# EAGLE board RTC_pt (EAGLE 6.1)

Size 46.99 x 55.88 mm. Coordinates in mm from the lower left corner, seen from the top.
Outline: 2.54,0 arc-90 0,2.54 0,53.34 arc-90 2.54,55.88 44.45,55.88 arc-90 46.99,53.34 46.99,36.83 arc-90 44.55,34.83 29.31,34.83 arc90 27.94,35.56 arc90 26.67,34.29 arc90 27.34,33.11 27.34,16.6 arc90 26.67,15.24 arc90 27.94,13.97 arc90 29.25,14.68 44.49,14.68 arc-90 46.99,12.7 46.99,2.54 arc-90 44.45,0 2.54,0
Copper layers (1*16): Top 0.035mm / dielectric 1.5mm / Bottom 0.035mm
Design rules: minimum track width 12mil, minimum drill 20mil, track to track 8mil, track to pad 8mil, pad to pad 8mil, via to via 8mil, smd to smd 8mil, copper to edge 8mil, drill to drill 8mil, minimum pad ring 12mil, minimum via ring 10mil, stop-mask expansion 4mil, vias tented up to drill 20mil, thermal gap 10mil

## Footprints (pad centres in the part's own frame; a part is rotated, then mirrored left to right if it is on the bottom)
STAND-OFF-TIGHT = hole 3.048: 0,0
NUBBIN_LOCKER = hole 3.048: 0,0

## Placement (x,y rotation side)
JP3  STAND-OFFTIGHT  [STAND-OFF-TIGHT]  3.81,3.81 0 top
JP7  STAND-OFFTIGHT  [STAND-OFF-TIGHT]  43.18,52.07 0 top
JP9  STAND-OFFTIGHT  [STAND-OFF-TIGHT]  43.18,3.81 0 top
JP10  STAND-OFFTIGHT  [STAND-OFF-TIGHT]  3.81,52.07 0 top
U$1  [NUBBIN_LOCKER]  24.13,26.67 270 top

## Library data of the parts
JP3 JP7 JP9 JP10 U$1 = SparkFun

## Text on the board
tPlace: RTC POGOBED | #348